# Altium PCB STEVAL-ESLWB0CB.PcbDoc (part 3 of 3)
Units mm, origin at the board's own origin, x right, y up, seen from the top; angles counter-clockwise.
Board outline 45.59 x 31.82 mm, 4 copper layers (Top Layer, Mid Layer 1, Mid Layer 2, Bottom Layer), stack 0.886 mm thick; 85 components, 64 nets, 270 pads, 388 vias.
Unrouted connection lines stored in the file: 146.
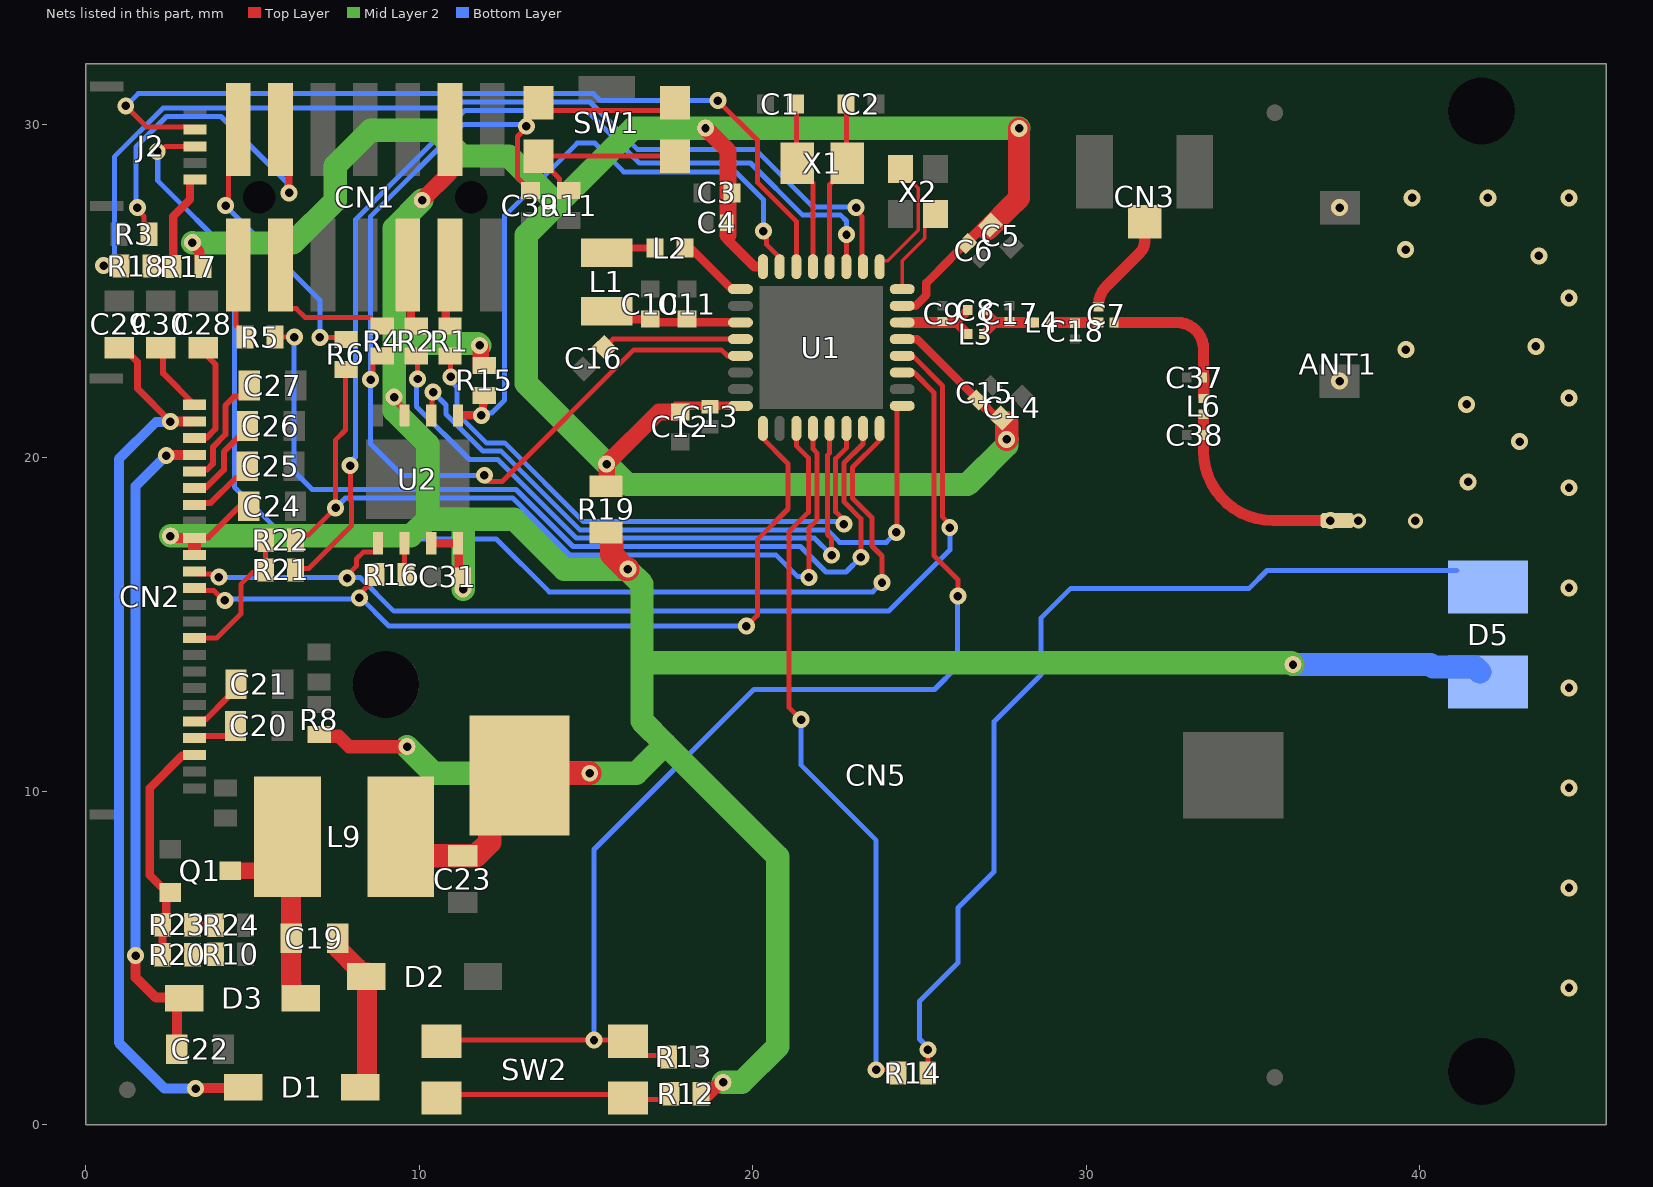
[diagram p4: the nets of this part, all layers, seen from the top]

## Via types
v1: diameter 0.508, hole 0.254, Top Layer to Bottom Layer, tented both sides, 209 vias
v2: diameter 0.4, hole 0.2, Top Layer to Bottom Layer, tented both sides, 157 vias
v3: diameter 0.508, hole 0.254, Top Layer to Bottom Layer, 20 vias
v4: diameter 0.45, hole 0.254, Top Layer to Bottom Layer, 2 vias

## Nets (pads, with @x,y where several pads share a name; then routed paths per layer and width w, separated by ;. In a path a pad name is that pad's centre, name@x,y a point inside that pad or via, vN(x,y) a via of type N, cw(c..) or ccw(c..) an arc to the next point about the centre after c; other vN are vias at no path point) (continued)
NetANT1_1: ANT1.1 C38.2 L6.2 | length 6.2
  Top Layer w0.34: L6.2@33.516,21.245 33.516,20.204 ccw(c35.599,20.204) 35.599,18.122 ANT1.1@37.523,18.122
  other v1: 37.319,18.122
  other v3: 44.476,4.106 44.476,7.106 44.476,10.106 44.476,13.106 44.476,16.106 44.476,19.106 41.452,19.284 42.993,20.489 41.406,21.604 44.476,21.797 37.6,22.303 39.587,23.245 43.482,23.344 44.476,24.797 43.573,26.061 39.58,26.245 37.6,27.505 39.773,27.797 42.042,27.797 44.476,27.797
  other v4: 38.158,18.113 39.869,18.113
NetC1_1: C1.1 U1.21 X1.1 | length 4.5
  Top Layer w0.15: X1.1@21.308,29.304 C1.1@21.308,30.679 ; X1.1@21.336,28.708 21.808,28.236 U1.21@21.808,25.735
NetC2_2: C2.2 U1.20 X1.2 | length 4.7
  Top Layer w0.15: U1.20@22.308,25.735 22.308,28.195 22.396,28.283 22.411,28.283 22.836,28.708 X1.2@22.836,28.833 ; X1.2@22.808,29.304 C2.2@22.808,30.679
NetC7_1: C7.1 C18.2 L4.2 | length 1.4
  Top Layer w0.34: L4.2@28.953,24.06 29.668,24.06 C7.1@30.319,24.06
NetC7_2: C7.2 CN3.1 | length 3
  Top Layer w0.34: C7.2@30.364,24.617 cw(c31.238,24.541) 30.618,25.161 31.623,26.166 ccw(c31.316,26.473) 31.75,26.473 CN3.1@31.75,27.079
NetC7_3: C7.3 C37.2 L6.1 | length 4.5
  Top Layer w0.34: C7.3@30.872,24.06 32.722,24.06 cw(c32.722,23.264) 33.518,23.264 33.518,22.449 33.52,22.447 L6.1@33.52,21.845
NetC8_1: C8.1 C9.2 L3.1 U1.14 | length 2.6
  Top Layer w0.28: 26.079,24.06 26.442,24.423 26.452,24.423 C8.1@26.452,24.433 ; 26.092,24.07 L3.1@26.453,23.709
  Top Layer w0.34: U1.14@24.483,24.06 25.693,24.06 26.088,24.06
NetC8_2: C8.2 C17.2 L3.2 L4.1 | length 2.1
  Top Layer w0.28: C8.2@26.922,24.433 27.284,24.071 ; L3.2@26.923,23.709 27.284,24.07
  Top Layer w0.34: 27.284,24.06 27.699,24.06 L4.1@28.406,24.06
NetC10_2: C10.2 C11.2 L1.1 U1.27 | length 4.1
  Top Layer w0.26: L1.1@15.621,24.402 15.863,24.16 C10.2@16.93,24.16 ; C10.2@16.93,24.068 18.03,24.068 19.625,24.068 U1.27@19.633,24.06
NetC16_2: C16.2 U1.28 | length 4.4
  Top Layer w0.15: C16.2@15.431,23.182 15.813,23.564 19.621,23.564 U1.28@19.625,23.56
NetC19_1: C19.1 D3.2 L9.2 Q1.3 | length 7.6
  Top Layer w0.5: Q1.3@4.336,7.618 5.397,7.618 6.047,8.268 L9.2@6.047,8.64
  Top Layer w0.6: L9.2@6.158,8.321 6.158,4.246 6.174,4.23 6.174,3.895 6.274,3.795 D3.2@6.449,3.795 ; L9.2@6.262,8.425 L9.2@6.604,8.767
NetC19_2: C19.2 D1.1 D2.2 | length 5
  Top Layer w0.6: C19.2@7.558,5.592 7.578,5.572 7.578,5.273 8.135,4.716 8.135,4.676 8.235,4.576 D2.2@8.446,4.576 ; D1.1@8.302,1.128 8.429,1.255 D2.2@8.429,4.557
NetC20_2: C20.2 CN2.4 | length 1.4
  Top Layer w0.18: CN2.4@3.262,11.594 3.322,11.654 4.471,11.654 C20.2@4.566,11.749
NetC21_2: C21.2 CN2.5 | length 1.6
  Top Layer w0.18: CN2.5@3.262,12.094 3.322,12.154 3.592,12.154 4.277,12.839 4.277,12.857 C21.2@4.531,12.857
NetC25_2: C25.2 CN2.18 | length 2.1
  Top Layer w0.18: CN2.18@3.262,18.594 3.309,18.641 3.736,18.641 4.49,19.395 4.615,19.395 4.845,19.625 C25.2@4.845,19.75
NetC26_2: C26.2 CN2.19 | length 2.9
  Top Layer w0.18: CN2.19@3.262,19.094 3.283,19.115 3.612,19.115 4.138,19.641 4.138,20.179 4.709,20.751 4.912,20.751 4.936,20.775 C26.2@4.936,20.977
NetC27_2: C27.2 CN2.20 | length 3.9
  Top Layer w0.18: CN2.20@3.262,19.594 3.322,19.654 3.64,19.654 3.81,19.824 3.81,20.324 4.191,20.705 4.191,21.578 4.449,21.836 4.728,21.836 5.142,22.25 C27.2@5.142,22.375
NetC28_2: C28.2 CN2.22 | length 3.2
  Top Layer w0.18: CN2.22@3.262,20.594 3.612,20.594 3.891,20.873 3.891,22.804 C28.2@3.535,23.16
NetCN1_4: CN1.4 R1.1 | length 1.9
  Top Layer w0.25: R1.1@10.795,23.949 10.795,25.658 CN1.4@10.922,25.785
NetCN1_6: CN1.6 R2.1 | length 2
  Top Layer w0.25: CN1.6@9.652,25.785 9.746,25.691 9.746,24.01 9.876,23.88 R2.1@9.906,23.88
NetCN1_11: CN1.11 R3.2 | length 10.8
  Top Layer w0.15: v1(1.55,27.504) 1.55,27.437 1.75,27.237 R3.2@1.75,26.704
  Top Layer w0.2: CN1.11@5.842,29.849 6.096,29.595 v1(6.096,27.944)
  Bottom Layer w0.15: v1(1.55,27.504) 1.509,27.545 1.509,29.325 2.421,30.237 4.057,30.237 6.034,28.26 6.034,28.006 v1(6.096,27.944)
NetCN1_12: CN1.12 R4.1 | length 4.4
  Top Layer w0.15: CN1.12@5.842,25.785 5.842,24.768 6.137,24.473 6.314,24.473 6.572,24.215 8.529,24.215 8.795,23.949 R4.1@8.89,23.949
NetCN1_13: CN1.13 R6.2 | length 8.4
  Top Layer w0.15: v1(4.191,27.563) 4.191,27.66 4.277,27.746 4.277,29.554 CN1.13@4.572,29.849 ; v1(7.018,23.612) 7.748,23.612 R6.2@7.802,23.558
  Bottom Layer w0.15: v1(4.191,27.563) 5.54,26.214 7.018,24.736 v1(7.018,23.612)
NetCN1_14: CN1.14 R5.1 | length 2.2
  Top Layer w0.15: CN1.14@4.502,25.728 4.502,23.987 4.59,23.899 4.596,23.899 4.776,23.719 R5.1@4.776,23.624
NetD5_1: D5.1 R14.1 | length 28.4
  Top Layer w0.15: R14.1@25.25,1.459 R14.1@25.25,1.554 v1(25.25,2.254)
  Bottom Layer w0.15: v1(25.25,2.254) 25.25,2.326 25.001,2.576 25.001,3.705 26.15,4.854 26.15,6.504 27.236,7.59 27.236,12.09 28.65,13.504 28.65,15.204 29.537,16.091 34.887,16.091 35.422,16.626 D5.1@41.122,16.626
NetL1_2: L1.2 L2.1 | length 1.5
  Top Layer w0.2: L1.2@15.63,26.135 15.788,26.293 L2.1@17.076,26.293
NetL2_2: L2.2 U1.25 | length 1.6
  Top Layer w0.25: L2.2@18.184,26.246 U1.25@19.347,25.083
NetR10_2: R10.2 R20.1 | length 0.7
  Top Layer w0.25: R20.1@3.2,5.104 3.208,5.112 3.878,5.112 R10.2@3.886,5.121
NetR11_2: R11.2 SW1.2 SW1.4 | length 5.6
  Top Layer w0.15: R11.2@14.478,28.013 14.383,28.013 14.203,28.193 14.203,28.367 13.571,28.999 SW1.4@13.571,29.049 SW1.2@17.671,29.049
NetR12_1: R12.1 SW2.B1 SW2.B2 | length 7.1
  Top Layer w0.15: SW2.B1@10.662,0.805 10.765,0.908 16.159,0.908 16.301,0.766 17.38,0.766 R12.1@17.545,0.931
NetR16_2: R16.2 U2.6 | length 1
  Top Layer w0.15: U2.6@9.56,17.441 9.56,16.551 R16.2@9.608,16.503
NetR23_1: R23.1 R24.1 | length 0.7
  Top Layer w0.25: R23.1@3.2,6.004 3.209,5.995 3.882,5.995 R24.1@3.891,5.987
NetU1_16: U1.16 X2.3 | length 2.7
  Top Layer w0.1: U1.16@24.483,25.06 24.483,25.909 25.162,26.588 25.162,27.048 X2.3@25.449,27.336
NetU1_17: U1.17 X2.1 | length 3.7
  Top Layer w0.1: U1.17@23.805,25.737 23.805,25.818 23.9,25.913 24.049,25.913 24.962,26.826 24.962,28.088 24.399,28.65 X2.1@24.399,28.663
PA0: J2.3 U1.8 | length 38.4
  Top Layer w0.15: v1(2.144,29.189) 2.241,29.189 2.393,29.341 J2.3@3.278,29.341 ; U1.8@23.805,20.88 23.805,20.532 22.988,19.714 22.988,18.799 23.577,18.21 23.577,17.358 23.876,17.059 v1(23.876,16.26)
  Bottom Layer w0.15: v1(2.144,29.189) 2.159,29.174 2.159,28.312 4.463,26.008 4.463,19.125 6.012,17.575 12.304,17.575 13.894,15.985 23.601,15.985 v1(23.876,16.26)
PA1: R5.2 U1.7 | length 27.3
  Top Layer w0.15: R5.2@5.722,23.665 5.777,23.61 5.79,23.623 v1(6.257,23.623) ; v1(23.241,17.022) 23.241,18.179 22.738,18.682 22.738,19.851 23.305,20.418 U1.7@23.305,20.88
  Bottom Layer w0.15: v1(6.257,23.623) 6.244,23.61 6.244,19.597 6.791,19.05 12.903,19.05 14.61,17.343 21.433,17.343 22.196,16.58 22.799,16.58 v1(23.241,17.022)
PA2: R1.2 U1.6 | length 17.9
  Top Layer w0.15: R1.2@10.922,23.049 10.944,23.027 v1(10.944,22.432) ; v1(22.733,18.015) 22.733,18.137 22.488,18.382 22.488,19.976 22.805,20.293 U1.6@22.805,20.88
  Bottom Layer w0.15: v1(10.944,22.432) 10.944,22.31 11.129,22.125 11.129,21.339 12.013,20.454 12.56,20.454 14.921,18.093 22.655,18.093 v1(22.733,18.015)
PA3: R2.2 U1.5 | length 19.5
  Top Layer w0.15: v1(9.952,22.366) R2.2@9.952,22.8 ; U1.5@22.305,20.88 22.305,20.147 22.238,20.08 22.238,17.701 22.366,17.573 v1(22.366,17.081)
  Bottom Layer w0.15: v1(9.952,22.366) 9.915,22.33 9.915,21.544 11.505,19.954 12.352,19.954 14.713,17.593 21.854,17.593 v1(22.366,17.081)
PA8: U1.9 U2.2 | length 20.9
  Top Layer w0.15: U2.2@10.36,21.277 10.388,21.304 10.388,21.946 v1(10.416,21.973) ; v1(24.306,17.768) 24.319,17.782 24.319,21.491 24.372,21.543 U1.9@24.71,21.543
  Bottom Layer w0.15: v1(10.416,21.973) 10.804,21.585 10.804,21.31 11.91,20.204 12.456,20.204 14.817,17.843 22.233,17.843 22.606,17.47 24.008,17.47 v1(24.306,17.768)
PA10: R13.2 SW2.A1 SW2.A2 U1.11 | length 35.6
  Top Layer w0.15: SW2.A1@10.662,2.505 10.701,2.544 v1(15.24,2.544) 16.223,2.544 SW2.A2@16.262,2.505 16.687,2.08 17.435,2.08 R13.2@17.479,2.036 ; U1.11@24.485,22.56 24.834,22.56 25.431,21.963 25.431,19.049 25.431,17.073 26.15,16.354 v1(26.15,15.854)
  Bottom Layer w0.15: v1(15.24,2.544) 15.24,8.259 20.035,13.054 25.45,13.054 26.136,13.74 26.136,15.84 v1(26.15,15.854)
PA11: CN2.14 U1.12 U2.5 | length 32.1
  Top Layer w0.15: CN2.14@3.262,16.594 3.337,16.519 3.738,16.519 3.766,16.491 3.922,16.491 v1(3.99,16.423) ; v1(7.836,16.398) 7.836,16.476 8.115,16.755 8.115,16.967 8.334,17.186 8.682,17.186 8.76,17.263 U2.5@8.76,17.441 ; U1.12@24.485,23.06 24.793,23.06 25.696,22.158 25.696,18.224 25.908,18.011 v1(25.908,17.911)
  Bottom Layer w0.15: v1(3.99,16.423) 3.996,16.417 7.817,16.417 v1(7.836,16.398) ; v1@7.821,16.413 8.229,16.413 9.239,15.403 24.072,15.403 25.908,17.239 v1(25.908,17.911)
PB0: R6.1 R22.2 U1.4 | length 25.6
  Top Layer w0.15: R22.2@6.292,17.53 6.455,17.693 6.684,17.693 v1(7.495,18.504) 7.495,20.542 7.788,20.835 R6.1@7.788,22.5 ; v1(21.687,16.418) 21.687,17.124 21.687,17.902 21.933,18.149 21.933,18.748 21.933,20.142 21.805,20.27 U1.4@21.805,20.88
  Bottom Layer w0.15: v1(7.495,18.504) 7.791,18.8 12.8,18.8 14.506,17.093 20.692,17.093 21.338,16.447 21.657,16.447 v1(21.687,16.418)
PB1: R14.2 U1.3 | length 21.3
  Top Layer w0.15: U1.3@21.305,20.88 21.305,20.364 21.666,20.003 21.666,18.368 21.082,17.784 21.082,12.522 v1(21.45,12.154) ; v1(23.7,1.654) 24.17,1.654 24.23,1.594 R14.2@24.23,1.522
  Bottom Layer w0.15: v1(21.45,12.154) 21.45,10.784 23.7,8.534 v1(23.7,1.654)
PB3: CN2.13 R16.1 U1.1 | length 24.5
  Top Layer w0.15: CN2.13@3.262,16.094 3.337,16.019 3.846,16.019 4.14,15.725 v1(4.175,15.725) ; v1(8.205,15.802) 8.205,15.905 8.708,16.408 R16.1@8.708,16.503 ; v1(19.812,14.958) 20.136,15.282 20.136,17.545 21.059,18.469 21.059,19.829 U1.1@20.303,20.585
  Bottom Layer w0.15: v1(4.175,15.725) 4.214,15.764 7.997,15.764 8.036,15.802 v1@8.249,15.802 ; v1(8.205,15.802) v1@8.249,15.802 ; v1(19.812,14.958) 19.81,14.956 9.095,14.956 v1@8.249,15.802
PB6: R15.1 U1.23 U2.1 | length 19.1
  Top Layer w0.15: v1(20.32,26.801) 20.406,26.715 20.406,26.402 20.805,26.003 U1.23@20.805,25.74
  Top Layer w0.25: U2.1@11.16,21.277 v1(11.863,21.277) 11.912,21.326 11.912,21.609 R15.1@11.933,21.631
  Bottom Layer w0.15: v1(11.863,21.277) 11.931,21.345 12.172,21.345 12.562,21.735 12.562,27.265 14.734,29.437 15.271,29.437 16.129,28.579 19.486,28.579 20.32,27.745 v1(20.32,26.801)
PB7: J2.2 U1.22 | length 26.3
  Top Layer w0.15: v1(1.2,30.554) 1.838,29.916 3.203,29.916 J2.2@3.278,29.841 ; v1(18.953,30.715) 18.953,30.708 20.146,29.515 20.146,28.253 21.305,27.094 U1.22@21.305,25.74
  Bottom Layer w0.15: v1(1.2,30.554) 1.57,30.924 15.221,30.924 15.43,30.715 v1(18.953,30.715)
PB14: R21.2 U1.19 | length 30.3
  Top Layer w0.15: R21.2@6.292,16.641 6.334,16.683 6.684,16.683 7.97,17.969 7.97,18.701 7.946,18.725 7.946,19.746 v1(7.924,19.768) ; U1.19@22.805,25.74 22.809,25.744 22.809,26.696 v1(22.811,26.698)
  Bottom Layer w0.15: v1(7.924,19.768) 7.924,19.865 8.089,20.03 8.089,27.143 11.37,30.424 15.014,30.424 16.597,28.841 19.931,28.841 21.495,27.277 22.638,27.277 22.811,27.104 v1(22.811,26.698)
PB15: R18.1 U1.18 | length 30
  Top Layer w0.15: v1(0.536,25.768) 0.986,25.768 R18.1@1,25.754 ; v1(23.1,27.504) 23.1,27.407 23.279,27.228 23.279,25.764 U1.18@23.308,25.735 ; U1.18@23.292,25.753 U1.18@23.305,25.74
  Bottom Layer w0.15: v1(0.536,25.768) 0.856,26.088 0.856,29.026 2.317,30.487 7.307,30.487 10.732,30.487 10.919,30.674 15.118,30.674 16.54,29.252 20.071,29.252 21.796,27.527 23.077,27.527 v1(23.1,27.504)
PREVGH: C22.2 CN2.21 D3.1 | length 19.6
  Top Layer w0.3: v1(1.494,5.078) 1.494,4.425 2.1,3.819 2.573,3.819 D3.1@2.663,3.909 ; v1(2.413,20.07) 2.437,20.094 CN2.21@3.262,20.094 ; C22.2@2.729,2.671 D3.1@2.729,3.795 ; D3.1@2.778,3.795 D3.1@2.949,3.795
  Bottom Layer w0.3: v1(1.494,5.078) 1.494,19.151 v1(2.413,20.07)
PREVGL: C29.2 CN2.23 D1.2 | length 27.5
  Top Layer w0.2: C29.2@1,23.304 1.125,23.304 1.55,22.879 1.55,22.076 v1(2.54,21.086) v1@2.548,21.094
  Top Layer w0.3: v1@2.548,21.094 CN2.23@3.262,21.094 ; v1(3.297,1.085) 3.318,1.107 4.706,1.107 D1.2@4.727,1.128
  Bottom Layer w0.3: v1(2.54,21.086) 2.532,21.078 2.105,21.078 0.99,19.963 0.99,2.464 2.369,1.085 v1(3.297,1.085)
RES: CN2.10 R21.1 R22.1 | length 4.4
  Top Layer w0.15: CN2.10@3.262,14.594 3.922,14.594 4.65,15.322 4.65,16.211 5,16.561 5.312,16.561 R21.1@5.392,16.641 R22.1@5.392,17.53
RESE: CN2.3 Q1.2 R20.2 R23.2 | length 7.2
  Top Layer w0.25: R20.2@2.3,5.104 R23.2@2.3,6.004 2.418,6.122 2.418,6.85 Q1.2@2.536,6.968 ; Q1.2@2.463,6.896 2.336,7.023 2.336,7.068 1.922,7.482 1.922,10.104 2.887,11.069 3.237,11.069 CN2.3@3.262,11.094 ; Q1.2@2.536,6.868 Q1.2@2.542,6.862
RSTN: C39.2 R4.2 SW1.1 SW1.3 U1.29 | length 34.2
  Top Layer w0.15: v1(8.544,22.348) 8.544,22.445 8.615,22.517 8.615,22.869 8.795,23.049 R4.2@8.89,23.049 ; v1@11.95,19.292 v1(11.95,19.479) ; v1@12.009,19.292 12.484,19.292 16.436,23.243 19.059,23.243 19.241,23.06 U1.29@19.625,23.06 ; C39.2@13.335,28.013 13.31,28.013 13.13,28.193 13.13,28.218 12.946,28.402 12.946,29.64 13.212,29.906 v1(13.212,29.945) 13.212,30.29 SW1.3@13.571,30.649 ; SW1.3@13.623,30.597 13.796,30.424 17.446,30.424 SW1.1@17.671,30.649
  Bottom Layer w0.15: v1@8.544,22.319 8.544,27.244 11.296,29.996 13.161,29.996 v1(13.212,29.945) ; v1(8.544,22.348) v1@8.647,22.245 ; v1@8.591,22.231 8.544,22.183 8.544,20.416 9.481,19.479 v1(11.95,19.479)
VCOM: C30.2 CN2.24 | length 2.1
  Top Layer w0.18: C30.2@2.321,23.304 2.321,22.535 CN2.24@3.262,21.594
VDD: C23.2 C24.2 C31.2 CN1.3 CN2.15 CN2.16 CN5.1 D5.2 L9.1 R8.1 R12.2 R15.2 R19.1 U2.3 U2.7 U2.8 | length 103
  Top Layer w0.18: CN2.16@3.262,17.444 CN2.16@3.262,17.594 3.287,17.619 3.681,17.619 4.595,18.533 C24.2@5.02,18.533
  Top Layer w0.2: v1(9.248,21.825) 9.248,21.767 9.56,21.454 U2.3@9.56,21.277
  Top Layer w0.25: U2.7@10.36,17.441 U2.8@11.16,17.441 11.188,17.414 11.188,16.549 C31.2@11.299,16.438 11.309,16.428 11.309,16.182 11.318,16.173 C31.2@11.349,16.173
  Top Layer w0.3: v1(2.54,17.657) 2.621,17.657 2.684,17.594 CN2.16@3.262,17.594
  Top Layer w0.4: 3.262,17.244 CN2.16@3.262,17.444 ; R8.1@7,11.704 7.055,11.649 7.59,11.649 7.899,11.34 v1(9.634,11.34) ; R12.2@18.666,0.916 18.987,1.237 19.075,1.237 v1(19.113,1.275)
  Top Layer w0.5: v1(10.085,27.727) 10.902,28.544 10.902,29.829 CN1.3@10.922,29.849 ; v1(11.811,23.372) 11.811,23.37 11.847,23.334 11.847,22.779 11.852,22.774 R15.2@11.947,22.774
  Top Layer w0.7: L9.1@9.634,8.827 L9.1@9.447,8.64 10.017,8.07 C23.2@11.303,8.07 11.702,8.07 12.112,8.48 12.112,9.586 CN5.1@13.009,10.483 ; CN5.1@13.071,10.545 v1(15.113,10.545) ; R19.1@15.771,17.488 15.771,17.104 16.211,16.664 v1(16.256,16.664)
  Mid Layer 2 w0.7: v1@2.546,17.663 9.749,17.663 10.251,18.165 ; v1(9.634,11.34) 10.429,10.545 v1(15.113,10.545) 16.51,10.545 17.378,11.413 ; v1(10.085,27.727) 9.248,26.89 9.248,23.43 ; v1(11.318,16.063) 11.318,17.974 11.509,18.165 ; v1(11.811,23.372) 11.753,23.43 9.248,23.43 ; v1@16.256,16.641 16.68,16.217 16.68,13.854 ; v1(16.256,16.664) 14.348,16.664 12.847,18.165 11.509,18.165 ; v1(19.113,1.275) 19.673,1.275 20.75,2.352 20.75,8.042 17.378,11.413 ; v1(36.2,13.804) 36.15,13.854 16.68,13.854 ; 9.248,23.43 9.248,21.411 10.251,20.407 10.251,18.165 ; 10.251,18.165 11.509,18.165 ; 16.68,13.854 16.68,12.112 17.378,11.413
  Bottom Layer w0.7: v1(36.2,13.804) 40.325,13.804 40.4,13.729 41.65,13.729 D5.2@41.8,13.579
VDD_BLUE: C3.2 C4.2 C5.2 C6.2 C12.2 C13.2 C14.2 C15.2 R17.1 R19.2 U1.13 U1.15 U1.24 U1.32 | length 73.4
  Top Layer w0.25: C12.2@17.684,21.56 U1.32@19.625,21.56 ; U1.13@24.485,23.56 24.924,23.56 C15.2@26.631,21.853 ; U1.15@24.485,24.56 24.875,24.56 25.206,24.891 25.206,25.249 25.923,25.965 ; 25.921,25.967 C6.2@26.275,26.321 ; C6.2@26.403,26.449 C6.2@26.407,26.453
  Top Layer w0.3: v1(3.2,26.454) 3.2,26.398 3.416,26.181 3.416,25.838 R17.1@3.5,25.754 ; 19.216,26.573 20.049,25.74 U1.24@20.235,25.74 ; C6.2@26.275,26.321 C6.2@26.403,26.449 ; C6.2@26.407,26.453 C5.2@26.954,27 ; C15.2@26.629,21.851 C15.2@26.739,21.742 ; C15.2@26.744,21.742 27.333,21.153 C14.2@27.409,21.153
  Top Layer w0.5: R19.2@15.621,19.154 v1(15.621,19.816) 17.182,21.377 C12.2@17.8,21.377 ; v1(18.584,29.887) 19.257,29.214 19.257,27.944 19.257,26.674
  Top Layer w0.65: C5.2@27.041,26.841 27.832,27.633 ; 27.854,27.658 27.985,27.789 v1(27.985,29.881)
  Top Layer w0.7: v1(27.614,20.558) C14.2@27.614,21.058
  Mid Layer 2 w0.7: v1(3.2,26.454) 3.209,26.445 6.212,26.445 7.482,27.715 7.482,28.764 8.541,29.823 10.508,29.823 11.277,29.054 12.687,29.054 14.138,27.604 ; v1(27.614,20.558) 27.614,20.379 26.439,19.204 16.233,19.204 v1(15.621,19.816) 13.208,22.229 13.208,26.674 14.138,27.604 ; v1(27.985,29.881) 27.979,29.887 v1(18.584,29.887) 16.421,29.887 14.138,27.604
VDD_EEP: J2.5 R17.2 R18.2 | length 3.3
  Top Layer w0.25: R18.2@1.905,25.754 R17.2@2.45,25.754 ; R17.2@2.621,25.739 2.621,27.241 3.128,27.748 J2.5@3.128,28.291
pads on no net: CN1.0 CN1.1 CN1.2 CN1.8 CN1.9 CN1.10 CN2.1 CN2.6 CN2.7 CN2.P1 CN2.P2 Designator3.1 J2.P1 J2.P2 U2.9

## Polygon pours and split planes (outlines as drawn)
GND on Mid Layer 1 "NONET_L-01_P-001" (solid, remove dead copper, pour order 0): 0,31.819 0,0.004 37.28,0.004 37.28,31.819
GND on Mid Layer 2 "NONET_L-01_P-001" (solid, remove dead copper, pour order 1): 0,31.819 0,0.004 37.28,0.004 37.28,31.819
GND on Bottom Layer "NONET_L-01_P-001" (solid, remove dead copper, pour order 2): 0,31.819 0,0.004 37.28,0.004 37.28,31.819
GND on Top Layer "NONET_L-01_P-001" (solid, remove dead copper, pour order 3): 0,31.819 0,0.004 37.28,0.004 37.28,31.819

## Keep-outs
Keep-Out Layer:
  lines w0.1: -0.05,0 ccw(c0,0) 0,-0.05 ; -0.05,0 ccw(c0,0) 0,-0.05 ; -0.05,0 -0.05,31.819 ; -0.05,31.819 cw(c0,31.819) 0,31.869 ; -0.05,31.819 cw(c0,31.819) 0,31.869 ; 0,-0.05 45.593,-0.05 ; 0,31.869 45.593,31.869 ; 45.593,-0.05 ccw(c45.593,0) 45.643,0 ; 45.593,-0.05 ccw(c45.593,0) 45.643,0 ; 45.593,31.869 cw(c45.593,31.819) 45.643,31.819 ; 45.593,31.869 cw(c45.593,31.819) 45.643,31.819 ; 45.643,0 45.643,31.819 ; 0.05,0.05 0.05,31.769 45.543,31.769 45.543,0.05 0.05,0.05

## Other copper
Top Layer:
  region net GND: 37.28,28.132 37.28,26.874 36.58,26.874 36.45,27.004 36.45,28.104 37.252,28.104
  pour cut-out: 21.629,29.383 22.308,29.383 22.308,26.822 21.63,26.822
  pour cut-out: 37.084,18.475 35.599,18.478 35.599,17.78 37.084,17.78
  region net GND: 25.585,24.913 25.083,24.411 25.585,24.411
  pour cut-out: 33.863,20.313 33.869,23.258 33.168,23.258 33.168,20.313
  pour cut-out: 30.95,27.679 32.55,27.679 32.55,26.414 30.95,26.414
  pour cut-out: 27.181,21.747 25.162,23.774 25.024,23.637 27.044,21.61
  pour cut-out: 25.835,25.486 26.137,25.184 26.29,25.336 25.988,25.639
  pour cut-out: 13.566,29.224 13.566,30.18 18.23,30.18 18.23,29.224
  pour cut-out: 16.399,28.237 16.399,28.337 18.923,28.337 18.923,28.237
  pour cut-out: 27.071,23.716 32.722,23.705 32.723,24.405 27.071,24.405
  pour cut-out: 24.158,23.711 26.196,23.707 26.196,24.41 24.158,24.41
  pour cut-out: 30.8,29.679 32.7,29.679 32.7,27.579 30.8,27.579
  pour cut-out: 14.846,26.579 16.396,26.579 16.396,24.822 14.846,24.822
  pour cut-out: 19.918,25.351 24.155,25.351 24.155,21.215 19.919,21.215
  pour cut-out: 16.396,28.24 16.714,28.24 16.714,24.715 16.396,24.715
  pour cut-out: 26.109,25.322 26.108,24.71 26.303,24.71 26.304,25.322
  pour cut-out: 25.463,25.071 26.843,26.446 26.706,26.584 25.326,25.209
  region net GND: 25.535,24.411 25.535,25.121 25.866,25.452 25.869,25.452 26.103,25.218 26.103,24.528 25.986,24.411
Mid Layer 1:
  pour cut-out: 30.8,29.679 32.7,29.679 32.7,26.579 30.8,26.579
Mid Layer 2:
  pour cut-out: 30.8,29.679 32.701,29.679 32.701,26.579 30.8,26.579
Bottom Layer:
  region net GND: 37.28,28.132 37.28,26.874 36.58,26.874 36.45,27.004 36.45,28.104 37.252,28.104

## Silkscreen, mask and mechanical layers (free items; w line width, h text height)
Top Overlay:
  circle w0.254: c4.064,10.873 r0.18
  circle w0.254: c1.778,3.56 r0.18
  circle w0.254: c11.916,5.623 r0.18
  circle w0.254: c9.376,1.517 r0.18
  lines w0.15: 18.45,26.033 18.45,26.533
Bottom Overlay:
  lines w0.254: 8.65,16.707 32.5,16.707 32.5,18.707 8.65,18.707 8.65,16.707 ; 12.2,14.204 28.95,14.204 28.95,16.204 12.2,16.204 12.2,14.204
  text "STV$ESLWB0CBA" at 11,26.354 h2.5 r180
  text "NOT FCC APPROVED FOR RESALE" at 9.35,18.237 h1.5 r180
  text "FOR EVALUATION ONLY" at 12.9,15.687 h1.5 r180
Top Assembly (Mech14):
  lines w0.05: -0.016,8.994 3.562,8.994 3.562,22.694 -0.016,22.694 -0.016,8.994 ; 0,27.241 3.578,27.241 3.578,31.441 0,31.441 0,27.241 ; 5.347,6.24 5.347,11.04 10.147,11.04 10.147,6.24 5.347,6.24 ; 7.788,17.187 12.132,17.187 12.132,21.531 7.788,21.531 7.788,17.187 ; 11.112,0 11.112,3.405 15.812,3.405 15.812,0 11.112,0
  lines w0.254: 0,0 45.593,0 45.593,31.819 0,31.819 0,0
Bottom Assembly (Mech15):
  the board outline again, w0.254
Mechanical 16:
  lines w0.001: 0.05,8.994 0.05,22.694 3.578,22.694 3.578,8.994 0.05,8.994 ; 0.05,27.241 0.05,31.441 3.578,31.441 3.578,27.241 0.05,27.241 ; 2.124,2.996 7.274,2.996 7.274,4.596 2.124,4.596 2.124,2.996 ; 3.902,0.328 9.052,0.328 9.052,1.928 3.902,1.928 3.902,0.328 ; 5.247,6.092 10.247,6.092 10.247,11.14 5.247,11.14 5.247,6.092 ; 7.585,3.763 12.735,3.763 12.735,5.363 7.585,5.363 7.585,3.763 ; 7.788,17.187 12.132,17.187 12.132,21.531 7.788,21.531 7.788,17.187 ; 9.862,0 17.062,0 17.062,3.405 9.862,3.405 9.862,0 ; 25.434,23.813 25.942,23.813 25.942,24.829 25.434,24.829 25.434,23.813 ; 26.133,24.182 26.133,24.69 27.149,24.69 27.149,24.182 26.133,24.182 ; 26.19,23.465 26.19,23.973 27.206,23.973 27.206,23.465 26.19,23.465 ; 27.417,23.782 27.925,23.782 27.925,24.798 27.417,24.798 27.417,23.782 ; 28.193,23.782 28.193,24.29 29.209,24.29 29.209,23.782 28.193,23.782 ; 29.402,23.293 29.91,23.293 29.91,24.309 29.402,24.309 29.402,23.293 ; 30.056,23.791 30.056,24.299 31.072,24.299 31.072,23.791 30.056,23.791 ; 32.746,22.151 32.746,22.659 33.762,22.659 33.762,22.151 32.746,22.151 ; 32.751,20.416 32.751,20.924 33.767,20.924 33.767,20.416 32.751,20.416 ; 33.259,21.072 33.767,21.072 33.767,22.088 33.259,22.088 33.259,21.072 ; 40.35,12.279 43.75,12.279 43.75,17.129 40.35,17.129 40.35,12.279
Drill Drawing:
  circle w0.254: c2.046,80.303 r0.828
  lines w0.254: 1.217,68.704 1.632,68.704 1.632,68.29 2.46,68.29 2.46,68.704 2.874,68.704 2.874,69.533 2.46,69.533 2.46,69.947 1.632,69.947 1.632,69.533 1.217,69.533 1.217,68.704 ; 1.217,73.675 2.874,73.675 2.046,72.018 1.217,73.675 ; 1.217,75.747 2.874,75.747 2.874,77.404 1.217,77.404 1.217,75.747
  lines w0.381: -0.27,67.172 119.193,67.172 ; -0.27,82.085 119.193,82.085 ; 9.31,63.443 9.31,85.813 ; 18.087,63.443 18.087,85.813 ; 34.553,63.443 34.553,85.813 ; 41.982,63.443 41.982,85.813 ; 52.796,63.443 52.796,85.813 ; 73.295,63.443 73.295,85.813 ; 82.157,63.443 82.157,85.813 ; 91.739,19.25 99.274,19.25 113.85,19.25 130.758,19.25 141.516,19.25 151.473,19.25 ; 91.739,22.85 99.274,22.85 113.85,22.85 130.758,22.85 141.516,22.85 151.473,22.85 ; 91.739,26.45 99.274,26.45 113.85,26.45 130.758,26.45 141.516,26.45 151.473,26.45 ; 91.739,30.05 99.274,30.05 113.85,30.05 130.758,30.05 141.516,30.05 151.473,30.05 ; 91.739,33.65 99.274,33.65 113.85,33.65 130.758,33.65 141.516,33.65 151.473,33.65 ; 91.739,37.25 99.274,37.25 113.85,37.25 130.758,37.25 141.516,37.25 151.473,37.25 ; 91.739,40.85 99.274,40.85 113.85,40.85 130.758,40.85 141.516,40.85 151.473,40.85 ; 91.739,44.45 99.274,44.45 113.85,44.45 130.758,44.45 141.516,44.45 151.473,44.45 ; 91.739,48.05 99.274,48.05 113.85,48.05 130.758,48.05 141.516,48.05 151.473,48.05 ; 91.739,51.65 99.274,51.65 113.85,51.65 130.758,51.65 141.516,51.65 151.473,51.65 ; 91.739,55.25 151.473,55.25 ; 93.733,63.443 93.733,85.813 ; 99.274,58.85 99.274,15.65 ; 106.449,63.443 106.449,85.813 ; 113.85,58.85 113.85,15.65 ; 130.758,58.85 130.758,15.65 ; 141.516,58.85 141.516,15.65 ; 99.274,15.65 91.739,15.65 91.739,58.85 151.473,58.85 151.473,15.65 141.516,15.65 ; 99.274,15.65 113.85,15.65 ; 113.85,15.65 130.758,15.65 ; 130.758,15.65 141.516,15.65 ; -0.27,63.443 119.193,63.443 119.193,85.813 -0.27,85.813 -0.27,63.443
  text "Symbol" at 1.966,83.203 h2.16
  text "Count" at 10.428,83.203 h2.16
  text "Hole Size" at 19.205,83.203 h2.16
  text "Plated" at 35.672,83.203 h2.16
  text "Hole Type" at 43.1,83.203 h2.16
  text "Drill Layer Pair" at 53.915,83.203 h2.16
  text "Via/Pad" at 74.413,83.203 h2.16
  text "Pad Shape" at 83.275,83.203 h2.16
  text "Template" at 94.851,83.203 h2.16
  text "Description" at 107.567,83.203 h2.16
  text "157" at 10.428,79.475 h1.8
  text "0.200mm (7.87mil)" at 19.205,79.475 h1.8
  text "PTH" at 35.672,79.475 h1.8
  text "Round" at 43.1,79.475 h1.8
  text "Top Layer - Bottom Layer" at 53.915,79.475 h1.8
  text "Via" at 74.413,79.475 h1.8
  text "Rounded" at 83.275,79.475 h1.8
  text "v40h20m0mx0" at 94.851,79.475 h1.8
  text "231" at 10.428,75.747 h1.8
  text "0.254mm (10.00mil)" at 19.205,75.747 h1.8
  text "PTH" at 35.672,75.747 h1.8
  text "Round" at 43.1,75.747 h1.8
  text "Top Layer - Bottom Layer" at 53.915,75.747 h1.8
  text "Via" at 74.413,75.747 h1.8
  text "Rounded" at 83.275,75.747 h1.8
  text "(Mixed)" at 94.851,75.747 h1.8
  text "2" at 10.428,72.018 h1.8
  text "0.970mm (38.19mil)" at 19.205,72.018 h1.8
  text "NPTH" at 35.672,72.018 h1.8
  text "Round" at 43.1,72.018 h1.8
  text "Top Layer - Bottom Layer" at 53.915,72.018 h1.8
  text "Pad" at 74.413,72.018 h1.8
  text "Rounded" at 83.275,72.018 h1.8
  text "c0hn97m107" at 94.851,72.018 h1.8
  text "3" at 10.428,68.29 h1.8
  text "2.000mm (78.74mil)" at 19.205,68.29 h1.8
  text "PTH" at 35.672,68.29 h1.8
  text "Round" at 43.1,68.29 h1.8
  text "Top Layer - Bottom Layer" at 53.915,68.29 h1.8
  text "Pad" at 74.413,68.29 h1.8
  text "Rounded" at 83.275,68.29 h1.8
  text "c200h200" at 94.851,68.29 h1.8
  text "393 Total" at 10.428,64.562 h1.8
  text "Layer" at 93.539,56.15 h1.8
  text "Name" at 101.074,56.15 h1.8
  text "Material" at 115.65,56.15 h1.8
  text "Thickness" at 132.558,56.15 h1.8
  text "Constant" at 143.316,56.15 h1.8
  text "Top Overlay" at 101.074,52.55 h1.8
  text "Top Solder" at 101.074,48.95 h1.8
  text "Solder Resist" at 115.65,48.95 h1.8
  text "0.010mm" at 132.558,48.95 h1.8
  text "3.5" at 143.316,48.95 h1.8
  text "1" at 93.539,45.35 h1.8
  text "Top Layer" at 101.074,45.35 h1.8
  text "0.035mm" at 132.558,45.35 h1.8
  text "Dielectric 1" at 101.074,41.75 h1.8
  text "S-1000-2 (2x2116)" at 115.65,41.75 h1.8
  text "0.240mm" at 132.558,41.75 h1.8
  text "4.34" at 143.316,41.75 h1.8
  text "2" at 93.537,38.15 h1.8
  text "Mid Layer 1" at 101.074,38.15 h1.8
  text "0.018mm" at 132.558,38.15 h1.8
  text "Dielectric 2" at 101.074,34.55 h1.8
  text "S-1000-2 (2x1506)" at 115.65,34.55 h1.8
  text "0.300mm" at 132.558,34.55 h1.8
  text "4.6" at 143.316,34.55 h1.8
  text "3" at 93.539,30.95 h1.8
  text "Mid Layer 2" at 101.074,30.95 h1.8
  text "0.018mm" at 132.558,30.95 h1.8
  text "Dielectric 3" at 101.074,27.35 h1.8
  text "S-1000-2 (2x2116)" at 115.65,27.35 h1.8
  text "0.240mm" at 132.558,27.35 h1.8
  text "4.34" at 143.316,27.35 h1.8
  text "4" at 93.539,23.75 h1.8
  text "Bottom Layer" at 101.074,23.75 h1.8
  text "0.035mm" at 132.558,23.75 h1.8
  text "Bottom Solder" at 101.074,20.15 h1.8
  text "Solder Resist" at 115.65,20.15 h1.8
  text "0.010mm" at 132.558,20.15 h1.8
  text "3.5" at 143.316,20.15 h1.8
  text "Bottom Overlay" at 101.074,16.55 h1.8
  text "Total board thickness:" at 93.539,12.95 h1.8
  text "0.906mm" at 132.558,12.95 h1.8

## Dimensions
0,0 to 0,31.819 on M2 - Board dimensions
0,0 to 45.593,0 on M2 - Board dimensions

## Text inside footprints (layer, text, board x,y; h text height)
CN1: Top Overlay "2" at 13.357,25.267 h1.5 r180; Top Overlay "1" at 13.132,31.367 h1.5 r180; Top Assembly (Mech14) "2" at 12.432,25.242 h1 r180; Top Assembly (Mech14) "14" at 5.007,25.292 h1 r180; Top Assembly (Mech14) "13" at 4.982,30.967 h1 r180; Top Assembly (Mech14) "1" at 12.332,30.967 h1 r180
Designator3: Mechanical 20 "Variant: '.VariantName'" at 49.942,-4.733 h3; Mechanical 20 "Gerber:" at 89.931,0.267 h3; Mechanical 20 "Layer:" at 49.943,0.267 h3; Mechanical 20 "R" at 135.439,-7.215 h1.52; Mechanical 20 "Date: '.Board_Document_Date'" at 49.942,-9.733 h3; Mechanical 20 "Ref: '.Board_Reference'" at 90.058,-4.733 h3; Mechanical 20 "Rev: '.Board_PCB_Revision'" at 90.001,-9.733 h3; Mechanical 20 "Project: '.Board_Name'" at 49.942,5.351 h3; Mechanical 21 "Project: '.Board_Name'" at 137.748,5.351 h3; Mechanical 21 "Rev: '.Board_PCB_Revision'" at 97.816,-9.733 h3; Mechanical 21 "Ref: '.Board_Reference'" at 97.759,-4.733 h3; Mechanical 21 "Date: '.Board_Document_Date'" at 137.748,-9.733 h3; Mechanical 21 "R" at 52.633,-7.215 h1.52; Mechanical 21 "Layer:" at 137.748,0.267 h3; Mechanical 21 "Gerber:" at 97.759,0.267 h3; Mechanical 21 "Variant: '.VariantName'" at 137.748,-4.733 h3
Designator16: Drill Drawing "TOP" at 0.3,44.8 h3; Drill Drawing "0.34" at 21.8,44.8 h3; Drill Drawing "IMPEDANCE TABLE" at 0.3,56.3 h3; Drill Drawing "LAYER" at 4.55,51.3 h3; Drill Drawing "TRACE" at 20.8,51.3 h3; Drill Drawing "SPACING" at 31.3,51.3 h3; Drill Drawing "IMPEDANCE" at 44.8,51.3 h3; Drill Drawing "(Single ended)" at 45.3,48.55 h2.5; Drill Drawing "(Differentiel)" at 63.05,48.55 h2.5; Drill Drawing "IMPEDANCE" at 61.8,51.3 h3; Drill Drawing "TOL." at 80.55,51.3 h3; Drill Drawing "50 ohm" at 48.55,44.8 h3; Drill Drawing "NA" at 65.05,44.8 h3; Drill Drawing "+/- 10%" at 79.05,44.8 h3; Drill Drawing "0.18" at 34.373,44.904 h3
Designator152: Drill Drawing "X  TG-170" at 55.85,118.55 h3; Drill Drawing "TG-150" at 74.1,118.55 h3; Drill Drawing "TG-140" at 90.1,118.55 h3; Drill Drawing "GOLDEN FINGER" at 90.1,103.55 h3; Drill Drawing "IMMERSION TIN" at 90.1,106.55 h3; Drill Drawing "BLACK" at 90.1,112.55 h3; Drill Drawing "BLACK" at 74.1,109.55 h3; Drill Drawing "RED" at 74.1,112.55 h3; Drill Drawing "BLUE" at 55.85,112.55 h3; Drill Drawing "YELLOW" at 55.85,109.55 h3; Drill Drawing "IMMERSION SILVER" at 55.85,106.55 h3; Drill Drawing "HASL (PB-FREE)" at 55.85,103.55 h3; Drill Drawing "X  YES  (SEE IMPEDANCE TABLE FOR DETAIL INFORMATION)" at 55.85,100.55 h3; Drill Drawing "NON-CONDUCTIVE EPOXY." at 90.1,94.55 h3; Drill Drawing "X  SOLDERMASK" at 64.85,94.55 h3; Drill Drawing "H.   STACK-UP :" at 0.85,91.55 h3; Drill Drawing "SEE LAYER STACK-UP SEQUENCE FOR OVERALL THICKNESS." at 39.35,91.55 h3; Drill Drawing "F.   IMPEDANCE CONTROL :" at 0.85,100.55 h3; Drill Drawing "G.   THROUGH VIA :" at 0.85,97.55 h3; Drill Drawing "PLUG MATERIAL :" at 39.35,94.55 h3; Drill Drawing "PLUG THE VIAS WHICH ARE COVERED WITH SOLDERMASK ONE OR TWO SIDE." at 39.35,97.55 h3; Drill Drawing "NO" at 39.35,100.55 h3; Drill Drawing "HASL" at 39.35,103.55 h3; Drill Drawing "X  ENIG" at 39.35,106.55 h3; Drill Drawing "X  WHITE" at 39.35,109.55 h3; Drill Drawing "FR-4" at 39.35,118.55 h3; Drill Drawing "N/A" at 39.35,115.55 h3; Drill Drawing "X  GREEN" at 39.35,112.55 h3; Drill Drawing "E.   SURFACE FINISH :" at 0.85,106.55 h3; Drill Drawing "D.   SILKSCREEN COLOR :" at 0.85,109.55 h3; Drill Drawing "C.   SOLDERMASK COLOR :" at 0.85,112.55 h3; Drill Drawing "B.   MATERIAL FAMILY :" at 0.85,115.55 h3; Drill Drawing "A.   MATERIAL :" at 0.85,118.55 h3; Drill Drawing "PCB SPECIFICATIONS :" at 0.85,122.55 h3
Q1: Top Assembly (Mech14) "1" at 2.261,8.368 h0.75 r270; Top Assembly (Mech14) "2" at 2.261,7.118 h0.75 r270; Top Assembly (Mech14) "3" at 4.136,7.768 h0.75 r270
SW1: Top Overlay "1" at 17.971,30.624 h1.5; Top Assembly (Mech14) "1" at 17.396,30.324 h1; Top Assembly (Mech14) "3" at 13.621,30.324 h1; Top Assembly (Mech14) "2" at 17.196,28.724 h1; Top Assembly (Mech14) "4" at 13.621,28.724 h1
U1: Top Overlay "1" at 20.058,20.235 h1.5 r90; Top Assembly (Mech14) "33" at 21.783,23.16 h0.5; Top Assembly (Mech14) "32" at 19.608,21.785 h0.5 r270; Top Assembly (Mech14) "25" at 19.608,25.31 h0.5 r270; Top Assembly (Mech14) "24" at 20.083,25.485 h0.5; Top Assembly (Mech14) "17" at 23.608,25.46 h0.5; Top Assembly (Mech14) "16" at 24.508,24.885 h0.5 r90; Top Assembly (Mech14) "9" at 24.508,21.46 h0.5 r90; Top Assembly (Mech14) "8" at 23.708,20.835 h0.5; Top Assembly (Mech14) "1" at 20.258,20.835 h0.5
X2: Top Assembly (Mech14) "1" at 24.312,28.713 h0.5 r270; Top Assembly (Mech14) "2" at 24.312,27.463 h0.5 r270; Top Assembly (Mech14) "3" at 25.287,27.463 h0.5 r270; Top Assembly (Mech14) "4" at 25.287,28.738 h0.5 r270